# Altium PCB Earphone-5.PcbDoc
Units mm, origin at the board's own origin, x right, y up, seen from the top; angles counter-clockwise.
Board outline 20.1 x 47.1 mm, 2 copper layers (Top Layer, Bottom Layer); 41 components, 27 nets, 159 pads, 24 vias.
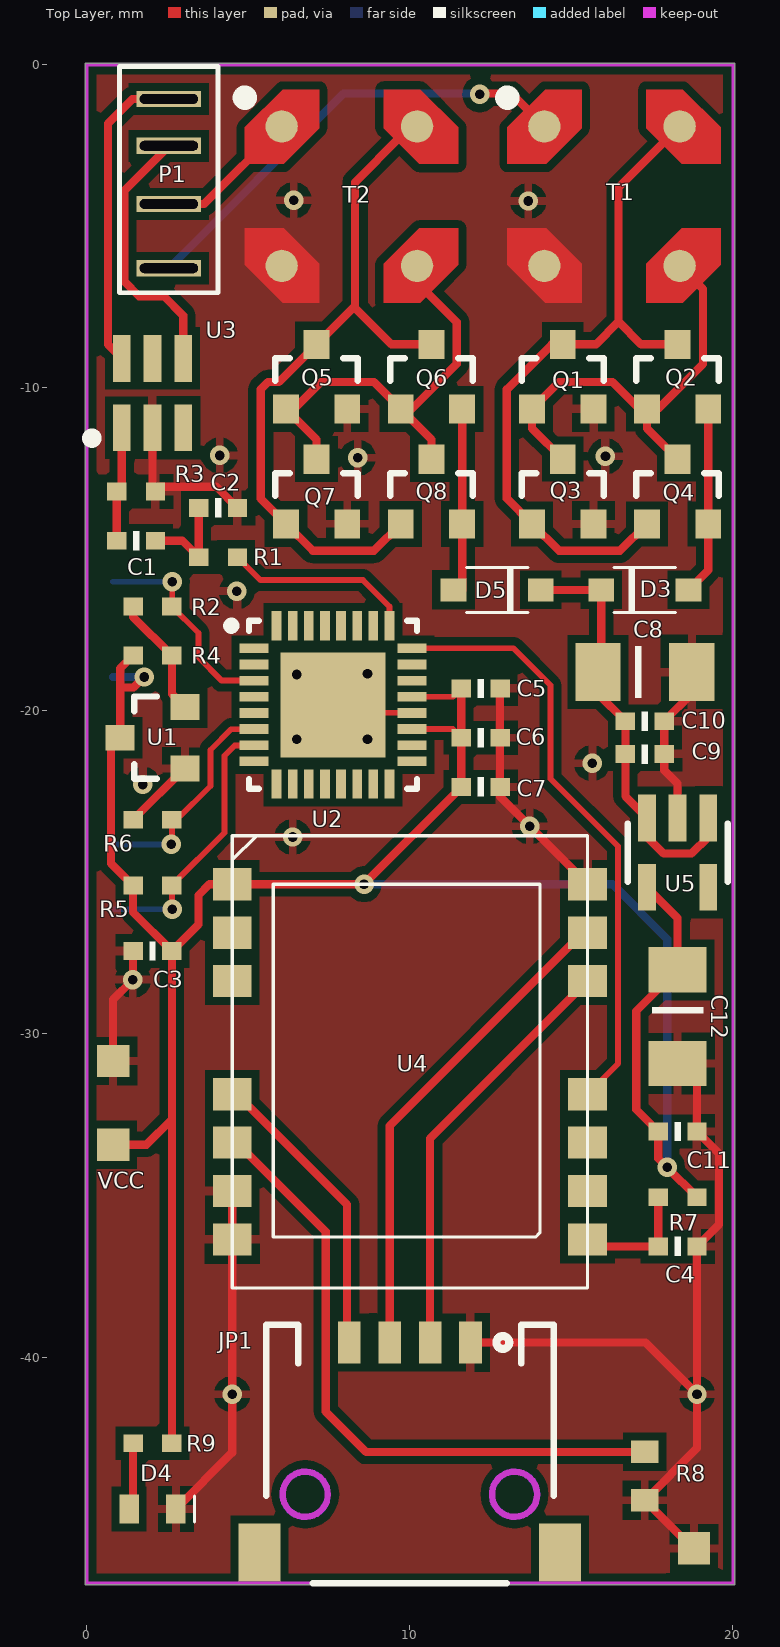
[diagram p0: Top Layer view]
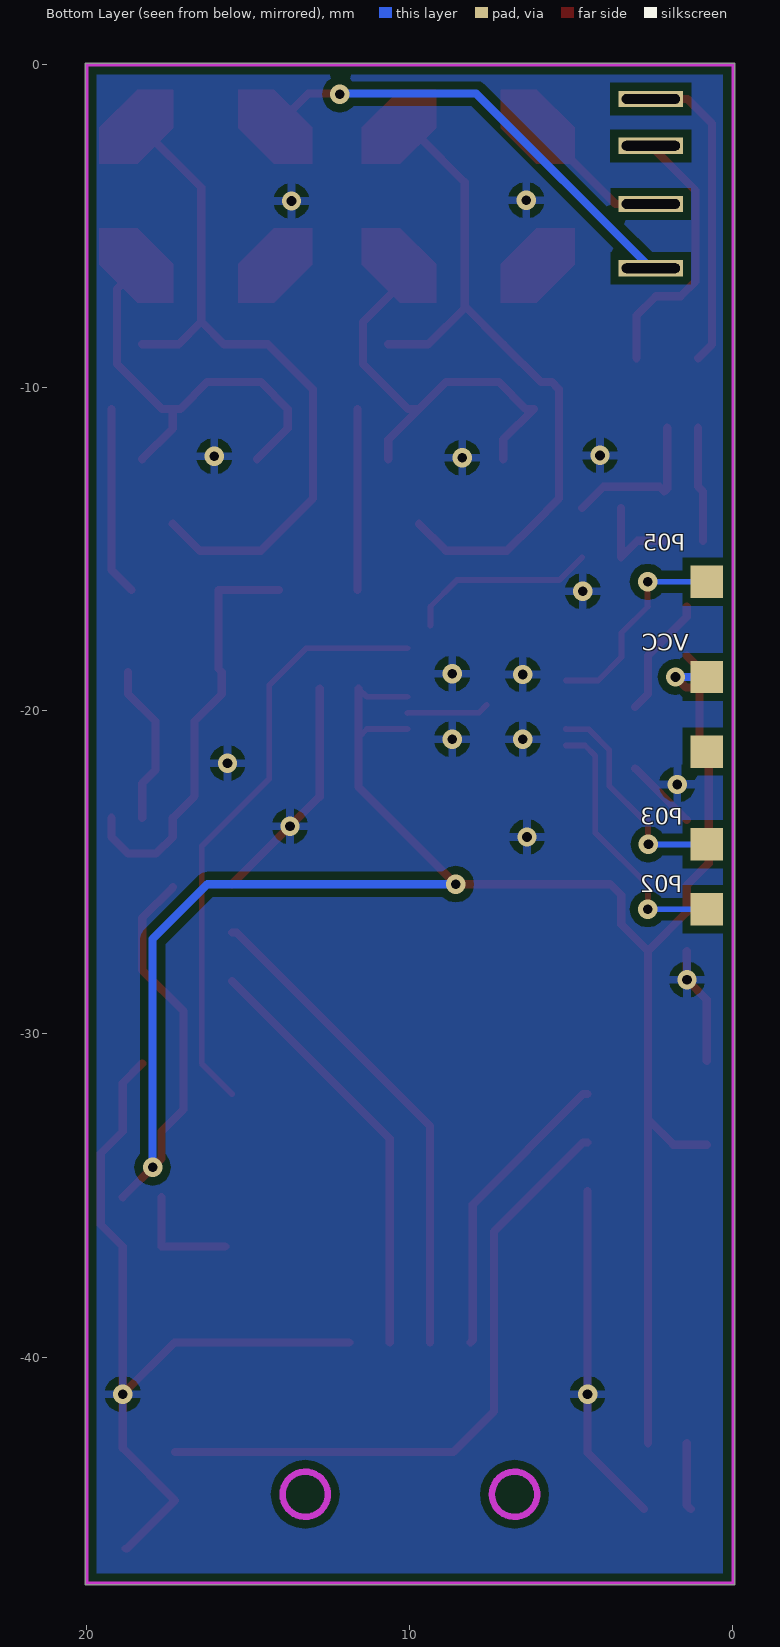
[diagram p1: Bottom Layer view, seen from below]
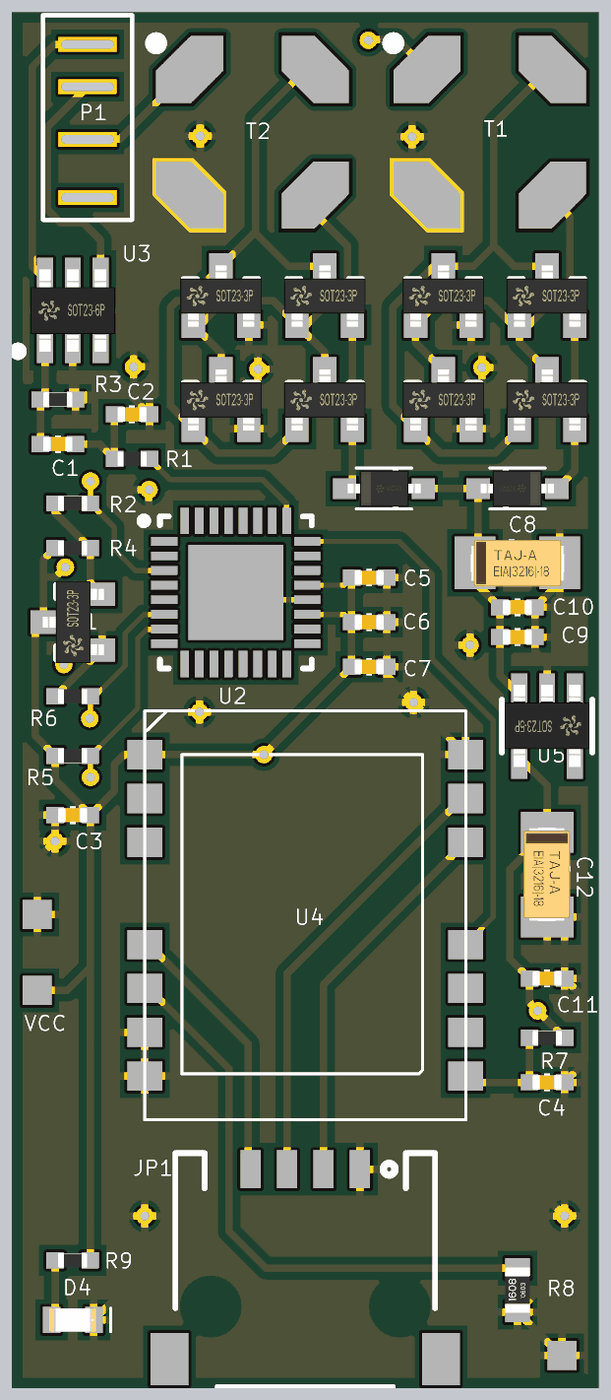
[diagram p2: 3D render of the assembled board from above, using the file's embedded part models]

## Layer stack, top to bottom
Top Solder: solder mask 0.0102, Solder Resist, Dk 3.5
Top Layer: signal copper 0.0356
Dielectric1: dielectric 0.32, FR-4, Dk 4.8
Bottom Layer: signal copper 0.0356
Bottom Solder: solder mask 0.0102, Solder Resist, Dk 3.5

## Board outline
-0.05,-47.05 20.05,-47.05 20.05,0.05 -0.05,0.05

## Design rules (kind name [scope] priority, off if disabled: settings)
Clearance [All] p1: gap=0.254
FabricationTestPointUsage TestPointUsage [All] p1: valid=0 allowmultiple=FALSE
FabricationTestpoint Testpoint [All] p1: side=3 testpointundercomponent=TRUE minsize=1.016 maxsize=2.54 preferedsize=1.524 minholesize=0 maxholesize=1.016 preferedholesize=0.813 testpointgrid=0.025 allowsidetop=TRUE allowsidebottom=TRUE usegrid=TRUE gridtolerance=0
HoleSize [All] p1: absolutevalues=TRUE maxlimit=2.54 minlimit=0.1 maxpercent=80.000 minpercent=20.000
HoleToHoleClearance [All] p1: gap=0.2 allowstackedmicrovias=TRUE
MinimumSolderMaskSliver [All] p1: minsoldermaskwidth=0.1
PolygonConnect [All] p1: connectstyle=Relief reliefconductorwidth=0.254 reliefentries=4 polygonreliefangle="90 Angle" airgapwidth=0.254
RoutingVias [All] p1: holewidth=0.711 width=1.27 viastyle="Through Hole" minholewidth=0.1 minwidth=0.1 maxholewidth=0.711 maxwidth=1.27
SilkToSilkClearance [All] p1: silktosilkclearance=0.1
SilkToSolderMaskClearance SilkscreenOverComponentPads [IsPad] p1: minsilkscreentomaskgap=0.1 clearancetoexposedcopper=TRUE
SolderMaskExpansion [All] p1: expansion=0.102
Width [All] p1: maxlimit=0.254 minlimit=0.1 preferedwidth=0.254 minimp=50.000000 maximp=50.000000 favimp=50.000000
23 further rules are at their usual default settings.

## Components (designator, comment, footprint, x,y, rotation, side; value= is the part's Value field where it differs from the comment)
C1 "2.2uF" 0402C 1.524,-14.732 r0 top
C2 "47pF" 0402C 4.064,-13.716 r180 top
C3 "10uF" 0402C 2.032,-27.432 r180 top
C4 "1uF" 0402C 18.288,-36.576 r180 top
C5 "0.01uF" 0402C 12.192,-19.304 r180 top
C6 "0.01uF" 0402C 12.192,-20.828 r180 top
C7 "0.01uF" 0402C 12.192,-22.352 r180 top
C8 "CP6032-100uF" T3216-18[A] 17.272,-18.796 r0 top
C9 "1uF" 0402C 17.272,-21.336 r180 top
C10 "10uF" 0402C 17.272,-20.32 r180 top
C11 "10uF" 0402C 18.288,-33.02 r180 top
C12 "CP6032-100uF" T3216-18[A] 18.288,-29.464 r270 top
D3 "PMEG4002EJ" SOD323 17.272,-16.256 r0 top
D4 "LED" 0603L 2.032,-44.704 r0 top
D5 "PMEG4002EJ" SOD323 12.7,-16.256 r180 top
JP1 "TEST_PAPER" TEST_PAPER 10,-42.8 r0 top
P1 "EarPhone" EARPHONE 2.54,-3.556 r0 top
Q1 "N-MOSFET" SOT23 14.732,-9.652 r0 top
Q2 "P-MOSFET" SOT23 18.288,-9.652 r0 top
Q3 "N-MOSFET" SOT23 14.732,-13.208 r0 top
Q4 "P-MOSFET" SOT23 18.288,-13.208 r0 top
Q5 "N-MOSFET" SOT23 7.112,-9.652 r0 top
Q6 "P-MOSFET" SOT23 10.668,-9.652 r0 top
Q7 "N-MOSFET" SOT23 7.112,-13.208 r0 top
Q8 "P-MOSFET" SOT23 10.668,-13.208 r0 top
R1 "1K" 0402R 4.064,-15.24 r180 top
R2 "10K" 0402R 2.032,-16.764 r180 top
R3 "1K" 0402R 1.524,-13.208 r0 top
R4 "100K" 0402R 2.032,-18.288 r180 top
R5 "10K" 0402R 2.032,-25.4 r0 top
R6 "10K" 0402R 2.032,-23.368 r180 top
R7 "10K" 0402R 18.288,-35.052 r0 top
R8 "NTC" 0603R 17.272,-43.688 r90 top
R9 "10K" 0402R 2.032,-42.672 r180 top
T1 "LPR6235" "TRANS EMI" 16.256,-4.064 r0 top
T2 "LPR6235" "Trans EMI" 8.128,-4.064 r0 top
U1 "MAX809" SOT23 2.032,-20.828 r90 top
U2 "LPC822M101JHI33" QFN50P500X500X100-33N 7.62,-19.812 r0 top
U3 "ASC0201" SOT23-6 2.032,-10.16 r0 top
U4 "RB1402" RB1402 10,-30.862 r0 top
U5 "MIC5231" SOT23-5 18.288,-24.384 r180 top

## Footprints (in the part's own frame and the unit in brackets; to place one, negate y for a bottom-side part, rotate by r counter-clockwise, add the part's x,y. Pads: shape width x height; smd on the part's side, far side on the other; paste and mask are expansions set on the pad)
0402C [mm]
  rect 0.6x0.55 smd: 1(-0.6,0) 2(0.6,0)
  silkscreen extent -0.1,-0.3 0.1,0.3, body extent -0.5,-0.25 0.5,0.25, height 0.5
0402R [mm]
  rect 0.6x0.55 smd: 1(-0.6,0) 2(0.6,0)
  body extent -0.5,-0.25 0.5,0.25, height 0.35
0603L [mm]
  rect 0.6x0.9 smd: 1(-0.725,0) 2(0.725,0)
  silkscreen extent 1.3,-0.4 1.3,0.4, body extent -0.8,-0.41 0.8,0.39, height 0.6
0603R [mm]
  rect 0.7x0.85 smd: 1(-0.75,0) 2(0.75,0)
  body extent -0.77,-0.43 0.77,0.43, height 0.46
EARPHONE [mm]
  rect 2x0.5 hole 0.3 slot 1.8 at 0 deg: 1(0,-2.74) 2(0,-0.75) 3(0,1.05) 4(0,2.5)
  silkscreen extent -1.52,-3.5 1.52,3.5
QFN50P500X500X100-33N [mm]
  rect 0.9x0.3 smd: 1(-2.45,1.75) 2(-2.45,1.25) 3(-2.45,0.75) 4(-2.45,0.25) 5(-2.45,-0.25) 6(-2.45,-0.75) 7(-2.45,-1.25) 8(-2.45,-1.75) 17(2.45,-1.75) 18(2.45,-1.25) 19(2.45,-0.75) 20(2.45,-0.25) 21(2.45,0.25) 22(2.45,0.75) 23(2.45,1.25) 24(2.45,1.75)
  rect 0.3x0.9 smd: 9(-1.75,-2.45) 10(-1.25,-2.45) 11(-0.75,-2.45) 12(-0.25,-2.45) 13(0.25,-2.45) 14(0.75,-2.45) 15(1.25,-2.45) 16(1.75,-2.45) 25(1.75,2.45) 26(1.25,2.45) 27(0.75,2.45) 28(0.25,2.45) 29(-0.25,2.45) 30(-0.75,2.45) 31(-1.25,2.45) 32(-1.75,2.45)
  rect 3.25x3.25 smd: 33(0,0)
  silkscreen extent -3.27,-2.6 2.6,2.6
RB1402 [mm]
  rect 1.2x1 smd: 1(-5.5,5.5) 2(-5.5,4) 3(-5.5,2.5) 4(-5.5,-1) 5(-5.5,-2.5) 6(-5.5,-4) 7(-5.5,-5.5) 8(5.5,-5.5) 9(5.5,-4) 10(5.5,-2.5) 11(5.5,-1) 12(5.5,2.5) 13(5.5,4) 14(5.5,5.5)
  silkscreen extent -5.5,-7 5.5,7
SOD323 [mm]
  rect 0.8x0.7 smd: 1(-1.35,0) 2(1.35,0)
  silkscreen extent -0.95,-0.7 0.95,0.7, body extent -1.26,-0.63 1.24,0.63, height 1.1
SOT23 [mm]
  rect 0.8x0.9 smd: 1(-0.95,-1) 2(0.95,-1) 3(0,1)
  silkscreen extent -1.28,-0.13 1.28,0.57, body extent -1.4,-1.07 1.4,1.03, height 0.9
SOT23-5 [mm]
  rect 0.55x1.45 smd: 1(-0.95,-1.075) 2(0,-1.075) 3(0.95,-1.075) 4(0.95,1.075) 5(-0.95,1.075)
  silkscreen extent -1.55,-0.9 1.55,0.9, body extent -1.45,-1.42 1.45,1.4, height 1.1
SOT23-6 [mm]
  rect 0.55x1.45 smd: 1(-0.95,-1.075) 2(0,-1.075) 3(0.95,-1.075) 4(0.95,1.075) 5(0,1.075) 6(-0.95,1.075)
  silkscreen extent -1.98,-1.5 -1.78,-1.3, body extent -1.45,-1.41 1.45,1.41, height 1.05
T3216-18[A] [mm]
  rect 1.4x1.8 smd: 1(-1.45,0) 2(1.45,0)
  silkscreen extent -0.3,-0.8 -0.1,0.8, body extent -1.6,-0.81 1.6,0.79, height 1.62
TEST_PAPER [mm]
  rect 1.3x1.8 smd: 0(-4.65,-3.25) 0(4.65,-3.25)
  rect 0.7x1.3 smd: 1(1.875,3.25) 2(0.625,3.25) 3(-0.625,3.25) 4(-1.875,3.25)
  Keep-Out Layer circle w0.2: c-3.24,-1.45 r0.7
  Keep-Out Layer circle w0.2: c3.24,-1.45 r0.7
  silkscreen extent -4.45,-4.2 4.45,3.8
"TRANS EMI" [mm]
  round 1 smd: 1(-2.095,2.159) 2(-2.095,-2.159) 3(2.095,-2.159) 4(2.095,2.159)
  Top Layer region: -3.237,1 -3.237,2.125 -2.061,3.3 -0.937,3.3 -0.937,2.1 -2.037,1
  Top Layer region: -3.237,-2.125 -2.061,-3.3 -0.937,-3.3 -0.937,-2.1 -2.037,-1 -3.237,-1
  Top Layer region: 1.064,-3.3 1.064,-2.1 2.164,-1 3.364,-1 3.364,-2.125 2.188,-3.3
  Top Layer region: 1.064,2.1 2.164,1 3.364,1 3.364,2.125 2.188,3.3 1.064,3.3
  silkscreen extent -3.37,2.92 -3.11,3.17
"Trans EMI" [mm]
  round 1 smd: 1(-2.095,2.159) 2(-2.095,-2.159) 3(2.095,-2.159) 4(2.095,2.159)
  Top Layer region: -3.237,1 -3.237,2.125 -2.061,3.3 -0.937,3.3 -0.937,2.1 -2.037,1
  Top Layer region: -3.237,-2.125 -2.061,-3.3 -0.937,-3.3 -0.937,-2.1 -2.037,-1 -3.237,-1
  Top Layer region: 1.064,-3.3 1.064,-2.1 2.164,-1 3.364,-1 3.364,-2.125 2.188,-3.3
  Top Layer region: 1.064,2.1 2.164,1 3.364,1 3.364,2.125 2.188,3.3 1.064,3.3
  silkscreen extent -3.37,2.92 -3.11,3.17

## Part data
C1 C2 C3 C4 C5 C6 C7 C9 C10 C11: library part CAP
C8 C12: library part "CAP POL2"
D3 D4 D5: "SOD323F"
Q1 Q3 Q5 Q7: "4N80 N-Channel MOSFET"
Q2 Q4 Q6 Q8: "P-Channel MOSFET"
R1 R2 R3 R4 R5 R6 R7 R8 R9: library part RES
T1 T2: library part "Trans EMI"
U1 U4: "SOT23"
U2 U3: "SOT23-6"

## Free pads (board coordinates)
  rect 1x1 smd: 1(0.813,-33.426) 1(0.813,-30.836) 1(18.796,-45.923)
  rect 1x1 smd far side: 1(0.813,-26.137) 1(0.813,-24.13) 1(0.813,-21.26) 1(0.813,-18.948) 1(0.813,-16.002)

## Via types
v1: diameter 0.6, hole 0.3, Top Layer to Bottom Layer, 24 vias

## Nets (pads, with @x,y where several pads share a name; then routed paths per layer and width w, separated by ;. In a path a pad name is that pad's centre, name@x,y a point inside that pad or via, vN(x,y) a via of type N, cw(c..) or ccw(c..) an arc to the next point about the centre after c; other vN are vias at no path point)
AINO: JP1.4 U4.4 | length 9.3
  Top Layer w0.254: U4.4 4.639,-31.862 8.052,-35.275 8.052,-39.477 JP1.4
G/M: P1.4 U3.6 | length 9.7
  Top Layer w0.254: U3.6 0.651,-8.654 0.651,-1.812 1.407,-1.056 P1.4
GND: C2.1 C3.2 C4.1 C5.1 C6.1 C7.1 C8.2 C9.1 C10.1 C11.1 C12.2 D4.2 JP1.1 pad.1@0.813,-30.836 pad.1@18.796,-45.923 Q1.2 Q3.2 Q5.2 Q7.2 R3.2 R6.2 R8.1 T1.2 T2.2 U1.1 U2.20 U2.33 U3.2 U4.6 U4.7 U4.14 U5.2 | length 60.9
  Top Layer w0.18: U2.33 7.864,-20.056 10.064,-20.056 U2.20
  Top Layer w0.254: pad.1@0.813,-30.836 0.813,-28.931 v1(1.422,-28.321) ; v1@1.432,-28.311 C3.2 ; R6.2 3.022,-21.778 U1.1 ; U3.2 2.032,-13.116 R3.2 2.272,-13.06 4.008,-13.06 C2.1 ; D4.2 4.5,-42.961 U4.7 U4.6 ; JP1.1 17.29,-39.55 v1(18.888,-41.148) ; C5.1 C6.1 C7.1 12.792,-22.654 U4.14 ; C12.2 18.888,-31.514 C11.1 19.569,-33.701 19.569,-35.895 C4.1 v1(18.888,-41.148) ; U5.2 18.288,-22.25 17.872,-21.834 C9.1 C10.1 18.722,-19.47 C8.2 ; pad.1@18.796,-45.923 18.757,-45.923 R8.1 18.888,-42.822 v1(18.888,-41.148)
  other v1: 4.5,-41.148 6.375,-23.901 13.712,-23.574 1.727,-22.276 15.646,-21.615 6.502,-20.879 8.687,-20.879 6.502,-18.872 8.687,-18.847 4.645,-16.294 8.382,-12.167 16.053,-12.116 4.115,-12.09 13.665,-4.216 6.401,-4.191
L-CH: P1.1 T1.1 | length 14.3
  Top Layer w0.254: v1(12.167,-0.914) 12.192,-0.889 13.144,-0.889 T1.1
  Bottom Layer w0.254: P1.1 7.947,-0.889 12.141,-0.889 v1(12.167,-0.914)
M/G: P1.3 U3.4 | length 8.4
  Top Layer w0.254: P1.3 1.159,-3.887 1.159,-6.704 1.618,-7.163 2.388,-7.163 2.982,-7.757 U3.4
MIC: C1.1 R3.1 U3.1 | length 3.6
  Top Layer w0.254: C1.1 R3.1 1.082,-13.05 U3.1
NetC1_2: C1.2 C2.2 R1.2 | length 3.1
  Top Layer w0.254: C1.2 2.956,-14.732 R1.2 C2.2
NetC4_2: C4.2 R7.1 U4.8 | length 3.5
  Top Layer w0.254: U4.8@15.714,-36.576 C4.2 R7.1
NetD3_2: D3.2 Q2.2 Q4.2 | length 5.9
  Top Layer w0.254: D3.2 19.238,-15.64 Q4.2 Q2.2
NetD4_1: D4.1 R9.2 | length 2.1
  Top Layer w0.254: D4.1 1.432,-44.579 R9.2
NetD5_2: D5.2 Q6.2 Q8.2 | length 5.6
  Top Layer w0.254: D5.2@11.618,-16.256 Q8.2 Q6.2
NetQ1_1: Q1.1 Q2.1 Q3.3 Q4.3 T1.3 | length 13.8
  Top Layer w0.254: Q3.3 13.782,-11.258 Q1.1 14.613,-9.821 16.274,-9.821 17.105,-10.652 Q2.1 ; Q4.3 17.338,-11.258 Q2.1 ; T1.3 19.069,-6.941 19.069,-9.26 17.677,-10.652 Q2.1
NetQ1_3: Q1.3 Q2.3 Q3.1 Q4.1 T1.4 | length 22
  Top Layer w0.254: Q4.1 16.507,-15.039 14.613,-15.039 Q3.1 13.001,-13.427 13.001,-10.044 14.393,-8.652 Q1.3 15.757,-8.652 16.459,-7.95 ; Q2.3 17.161,-8.652 16.459,-7.95 ; T1.4 16.459,-3.797 16.459,-7.95
NetQ5_1: Q5.1 Q6.1 Q7.3 Q8.3 T2.3 | length 14.2
  Top Layer w0.254: Q7.3 7.112,-11.602 Q5.1 6.417,-10.652 7.248,-9.821 8.887,-9.821 Q6.1 ; 9.716,-6.223 11.449,-7.957 11.449,-9.26 10.057,-10.652 Q6.1 ; Q8.3 10.668,-11.602 Q6.1
NetQ5_3: Q5.3 Q6.3 Q7.1 Q8.1 T2.4 | length 21.8
  Top Layer w0.254: 9.716,-1.905 9.716,-2.222 8.303,-3.635 8.303,-7.461 ; Q8.1 8.887,-15.039 6.993,-15.039 Q7.1 5.381,-13.427 5.381,-10.044 5.604,-9.821 5.943,-9.821 Q5.3 8.303,-7.461 ; Q6.3 9.433,-8.652 8.303,-7.522 8.303,-7.461
NetR2_2: R2.2 R4.1 U1.2 | length 3.8
  Top Layer w0.254: R2.2 1.432,-17.088 R4.1 2.632,-19.478 U1.2
NTC: R8.2 U4.5 | length 20
  Top Layer w0.254: U4.5 4.639,-33.362 7.394,-36.117 7.394,-41.684 8.648,-42.938 R8.2
P02: pad.1@0.813,-26.137 R5.2 U2.7 | length 8.3
  Top Layer w0.18: v1@2.632,-26.127 R5.2 4.26,-23.772 4.26,-21.386 4.578,-21.068 5.164,-21.068 U2.7
  Bottom Layer w0.18: pad.1@0.813,-26.137 v1(2.642,-26.137)
P03: pad.1@0.813,-24.13 R6.1 U2.6 | length 6.9
  Top Layer w0.18: v1@2.632,-24.114 R6.1 2.778,-23.368 3.826,-22.32 3.826,-21.206 4.464,-20.568 5.164,-20.568 U2.6
  Bottom Layer w0.18: pad.1@0.813,-24.13 v1(2.616,-24.13)
P05: pad.1@0.813,-16.002 R2.1 U2.3 | length 6.5
  Top Layer w0.18: R2.1 3.454,-17.586 3.454,-18.339 4.178,-19.062 U2.3 ; R2.1@2.642,-16.754 v1(2.642,-16.002)
  Bottom Layer w0.18: pad.1@0.813,-16.002 v1(2.642,-16.002)
P14: R1.1 U2.25 | length 5.9
  Top Layer w0.18: R1.1 5.375,-15.951 8.546,-15.951 9.364,-16.77 9.364,-17.356 U2.25
PT15: JP1.2 U4.12 | length 13.2
  Top Layer w0.254: JP1.2 10.625,-33.237 U4.12
PT16: JP1.3 U4.13 | length 15.3
  Top Layer w0.254: JP1.3 9.375,-32.848 15.361,-26.862 U4.13
R-CH: P1.2 T2.1 | length 4.5
  Top Layer w0.254: P1.2 3.631,-4.306 T2.1
RXD: U2.24 U4.11 | length 18.7
  Top Layer w0.18: U2.24 13.211,-18.062 14.351,-19.202 14.351,-22.098 16.444,-24.191 16.444,-30.918 U4.11
VCC: C3.1 C5.2 C6.2 C7.2 C11.2 C12.1 pad.1@0.813,-18.948 pad.1@0.813,-33.426 R4.2 R5.1 R7.2 R9.1 U1.3 U2.19 U2.21 U4.1 U5.4 | length 75.8
  Top Layer w0.18: U2.19 11.326,-20.562 C6.2 ; U2.21 11.334,-19.562 C5.2
  Top Layer w0.254: pad.1@0.813,-33.426 1.845,-33.426 2.632,-32.639 ; R4.2 1.032,-18.688 1.032,-19.279 ; v1(1.778,-18.948) 1.448,-19.279 1.032,-19.279 ; R9.1 2.632,-32.639 ; C5.2 C6.2 C7.2 v1(8.582,-25.362) U4.1 3.797,-25.362 3.454,-25.705 3.454,-26.61 C3.1 ; U5.4 18.288,-26.409 C12.1 17.007,-29.295 17.007,-32.339 C11.2 17.688,-33.852 v1(17.965,-34.129) R7.2 ; 1.032,-19.279 U1.3 0.751,-21.109 0.751,-24.719 R5.1 1.432,-26.232 C3.1 ; 2.632,-32.639 C3.1
  Bottom Layer w0.254: pad.1@0.813,-18.948 v1(1.778,-18.948) ; v1(8.582,-25.362) 16.269,-25.362 17.965,-27.058 v1(17.965,-34.129)
VCCIN: C8.1 C9.2 C10.2 D3.1 D5.1 U5.1 U5.3 | length 13
  Top Layer w0.254: D5.1 D3.1 C8.1@15.922,-18.696 ; C8.1 15.822,-19.47 C10.2 C9.2 16.672,-22.643 U5.3 17.338,-23.898 17.855,-24.415 18.721,-24.415 19.238,-23.898 U5.1
pads on no net: JP1.0 U2.1 U2.2 U2.4 U2.5 U2.8 U2.9 U2.10 U2.11 U2.12 U2.13 U2.14 U2.15 U2.16 U2.17 U2.18 U2.22 U2.23 U2.26 U2.27 U2.28 U2.29 U2.30 U2.31 U2.32 U3.3 U3.5 U4.2 U4.3 U4.9 U4.10 U5.5

## Polygon pours and split planes (outlines as drawn)
GND on Bottom Layer "Top Layer-No Net" (solid, remove dead copper, pour order 2): 0,0 20,0 20,-47 0,-47
GND on Top Layer "Top Layer-No Net" (solid, remove dead copper, pour order 4): 0,-47 20,-47 20,0 0,0

## Keep-outs
Keep-Out Layer:
  lines w0.1: 0,-47 0,0 20,0 20,-47 0,-47

## Silkscreen, mask and mechanical layers (free items; w line width, h text height)
Top Overlay:
  text "VCC" at 0.33,-34.798 h0.51
Bottom Overlay:
  text "P05" at 1.473,-15.037 h0.51
  text "VCC" at 1.372,-18.136 h0.51
  text "P03" at 1.549,-23.52 h0.51
  text "P02" at 1.567,-25.615 h0.51

## Text inside footprints (layer, text, board x,y; h text height)
C8: Mechanical 15 "+" at 15.875,-19.304 h0.51; Mechanical 15 "-" at 18.161,-19.177 h0.51
C12: Mechanical 15 "+" at 17.78,-28.067 h1.5 r270; Mechanical 15 "-" at 17.907,-30.353 h1.5 r270
U2: Mechanical 15 "1" at 7.456,-20.262 h0.51